# Altium PCB Hefesto.PcbDoc
Units mm, origin at the board's own origin, x right, y up, seen from the top; angles counter-clockwise.
Board outline 60 x 55 mm, 4 copper layers (Top Layer, GND Plane, Power Plane, Bottom Layer), stack 0.603 mm thick; 68 components, 52 nets, 247 pads, 55 vias.
Unrouted connection lines stored in the file: 40.
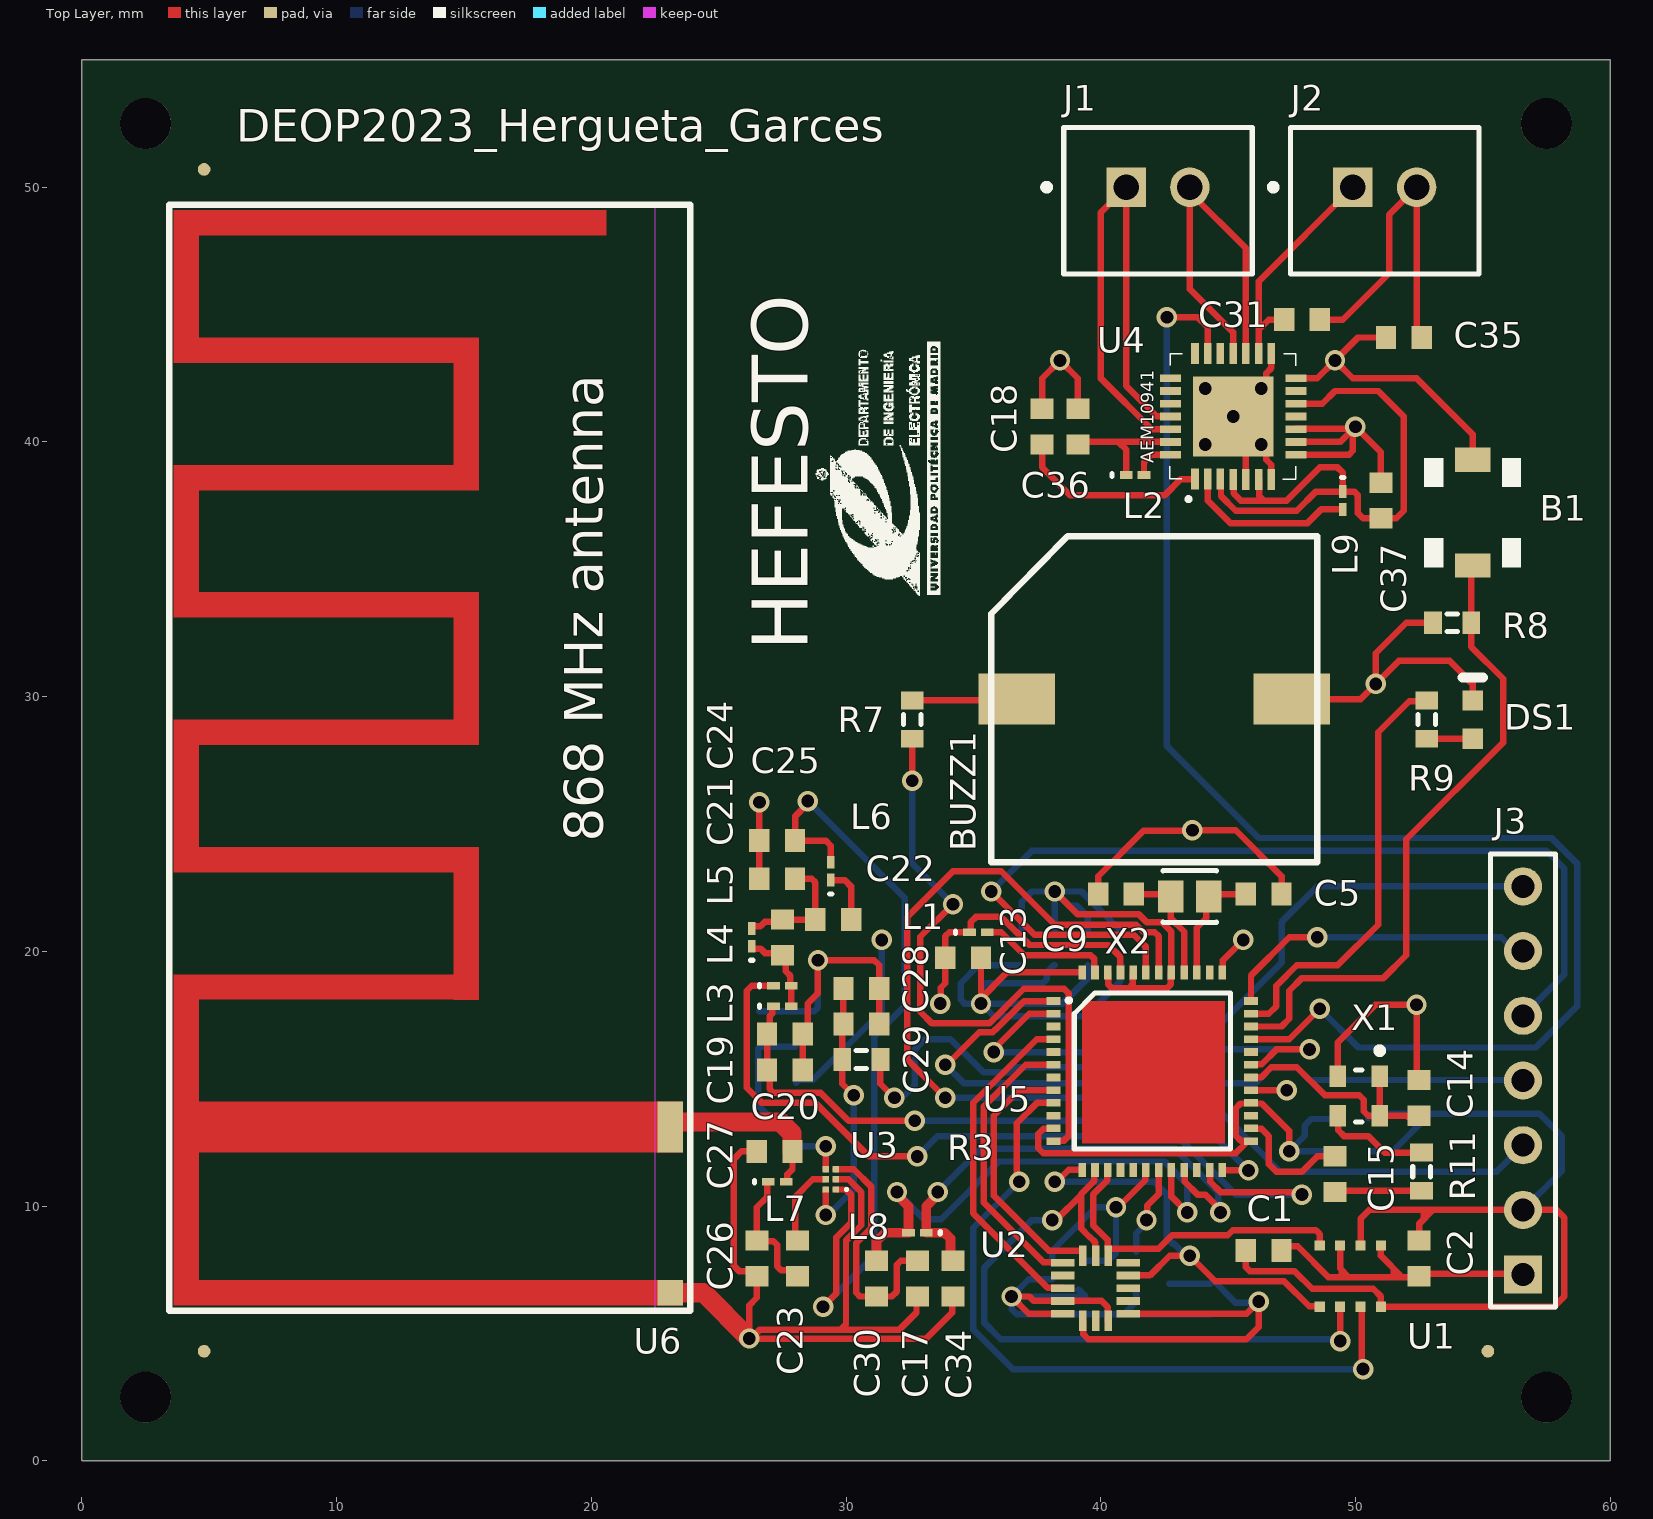
[diagram p0: Top Layer view]
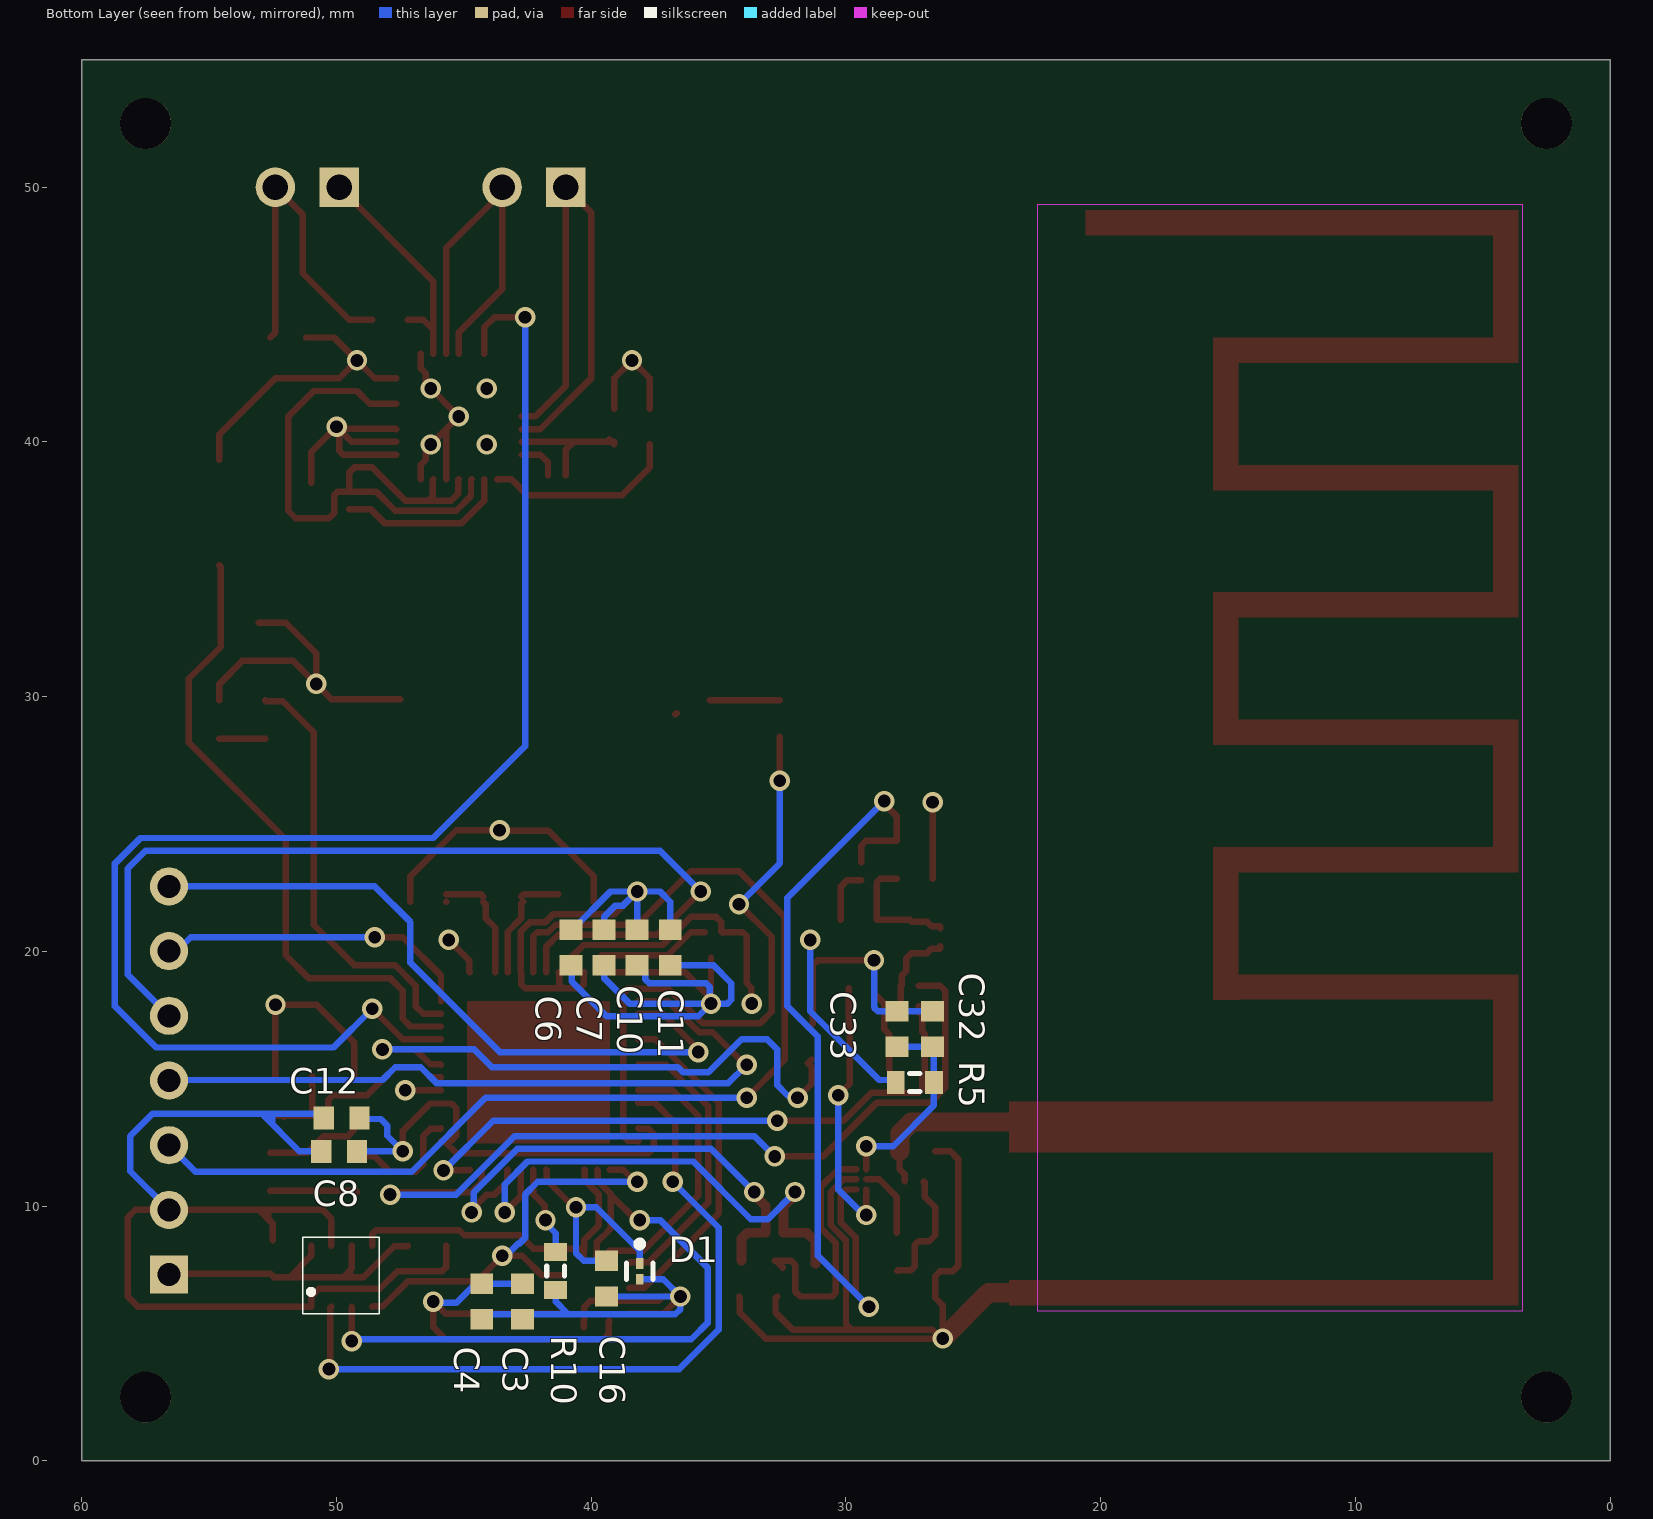
[diagram p1: Bottom Layer view, seen from below]
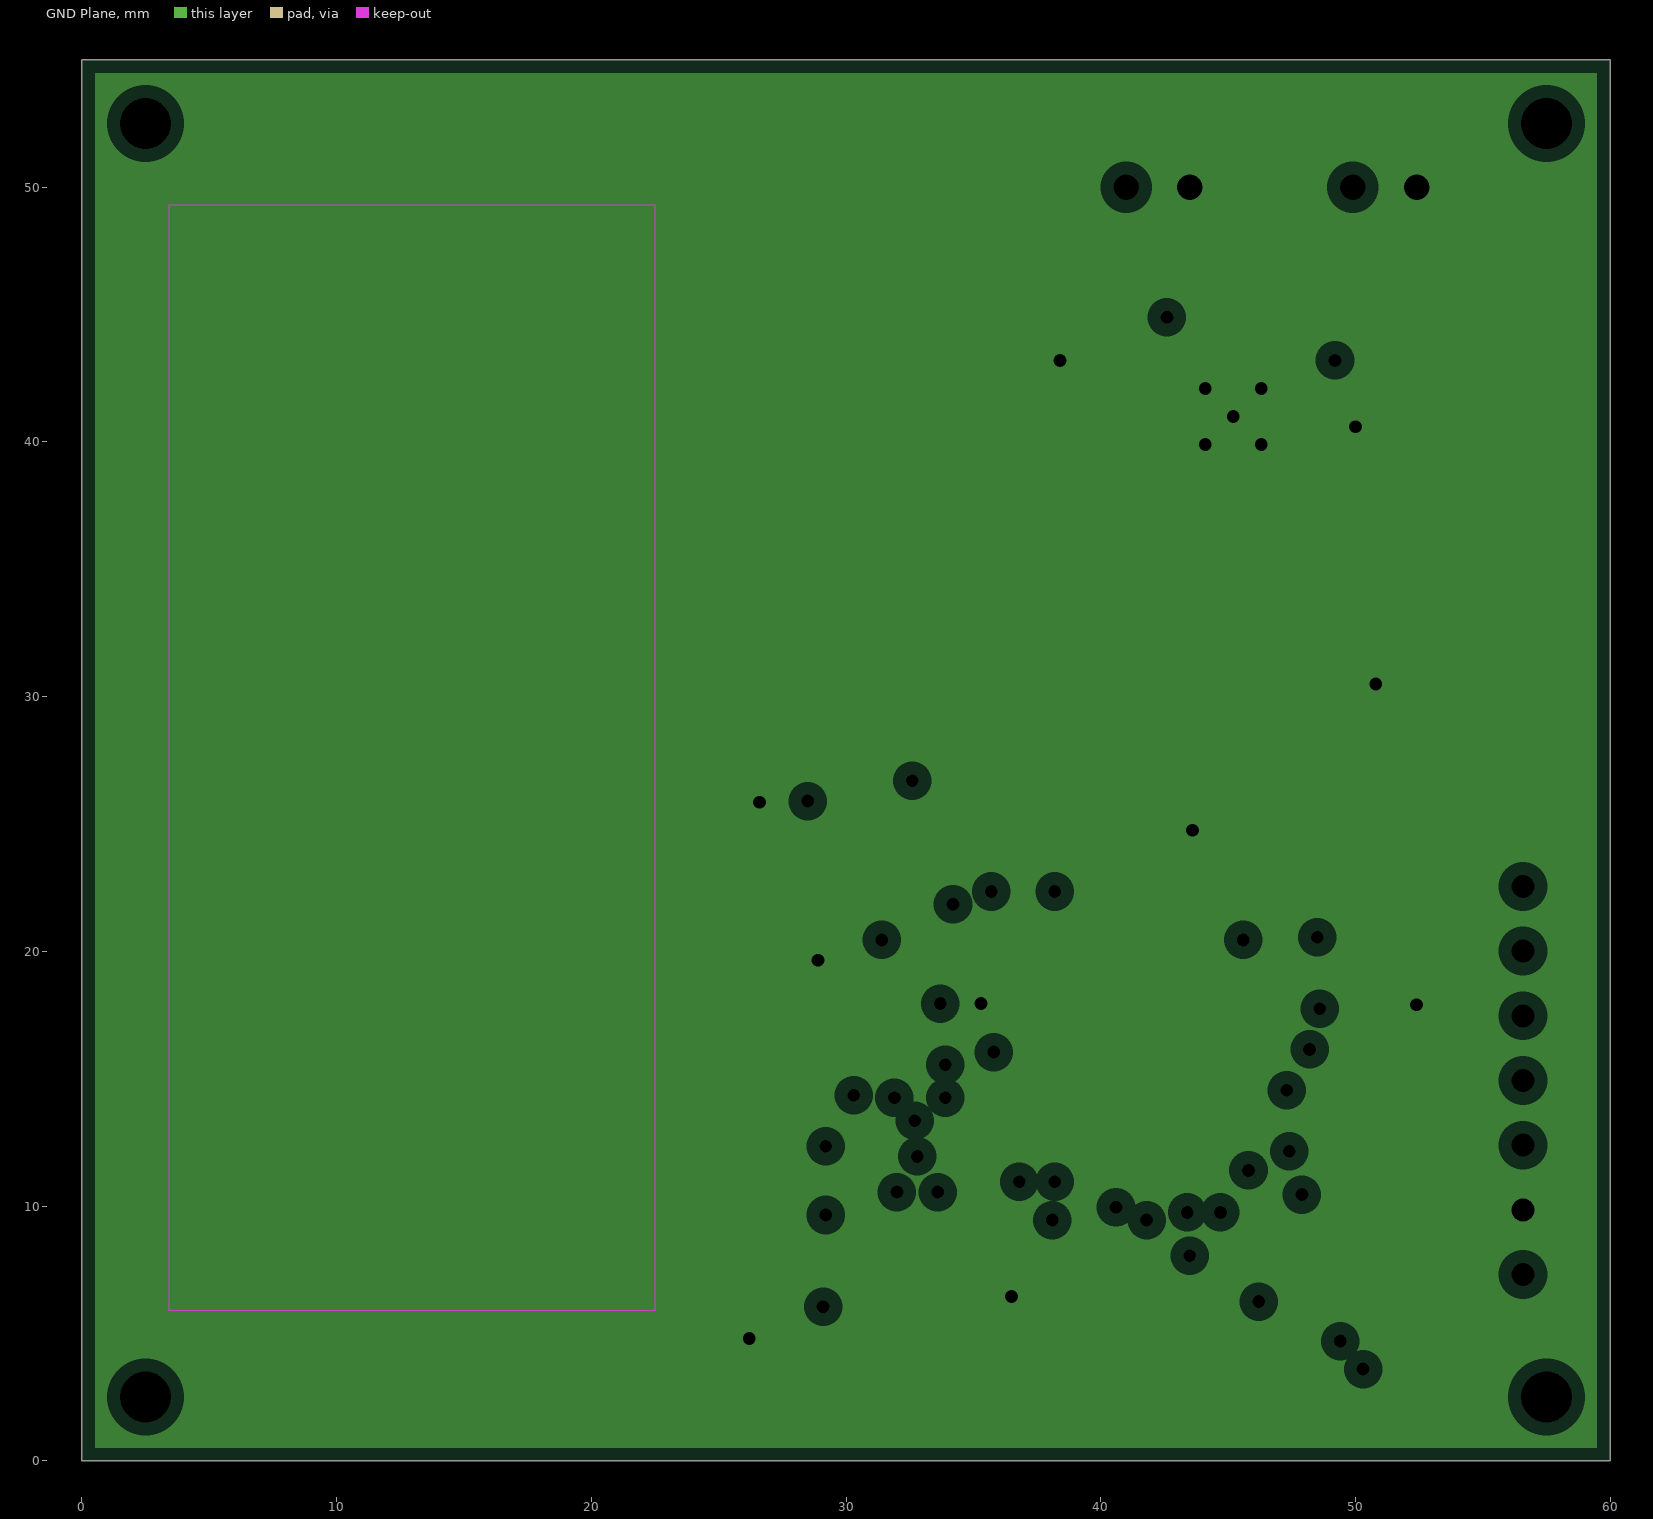
[diagram p2: GND Plane, clearances drawn from the general rule]
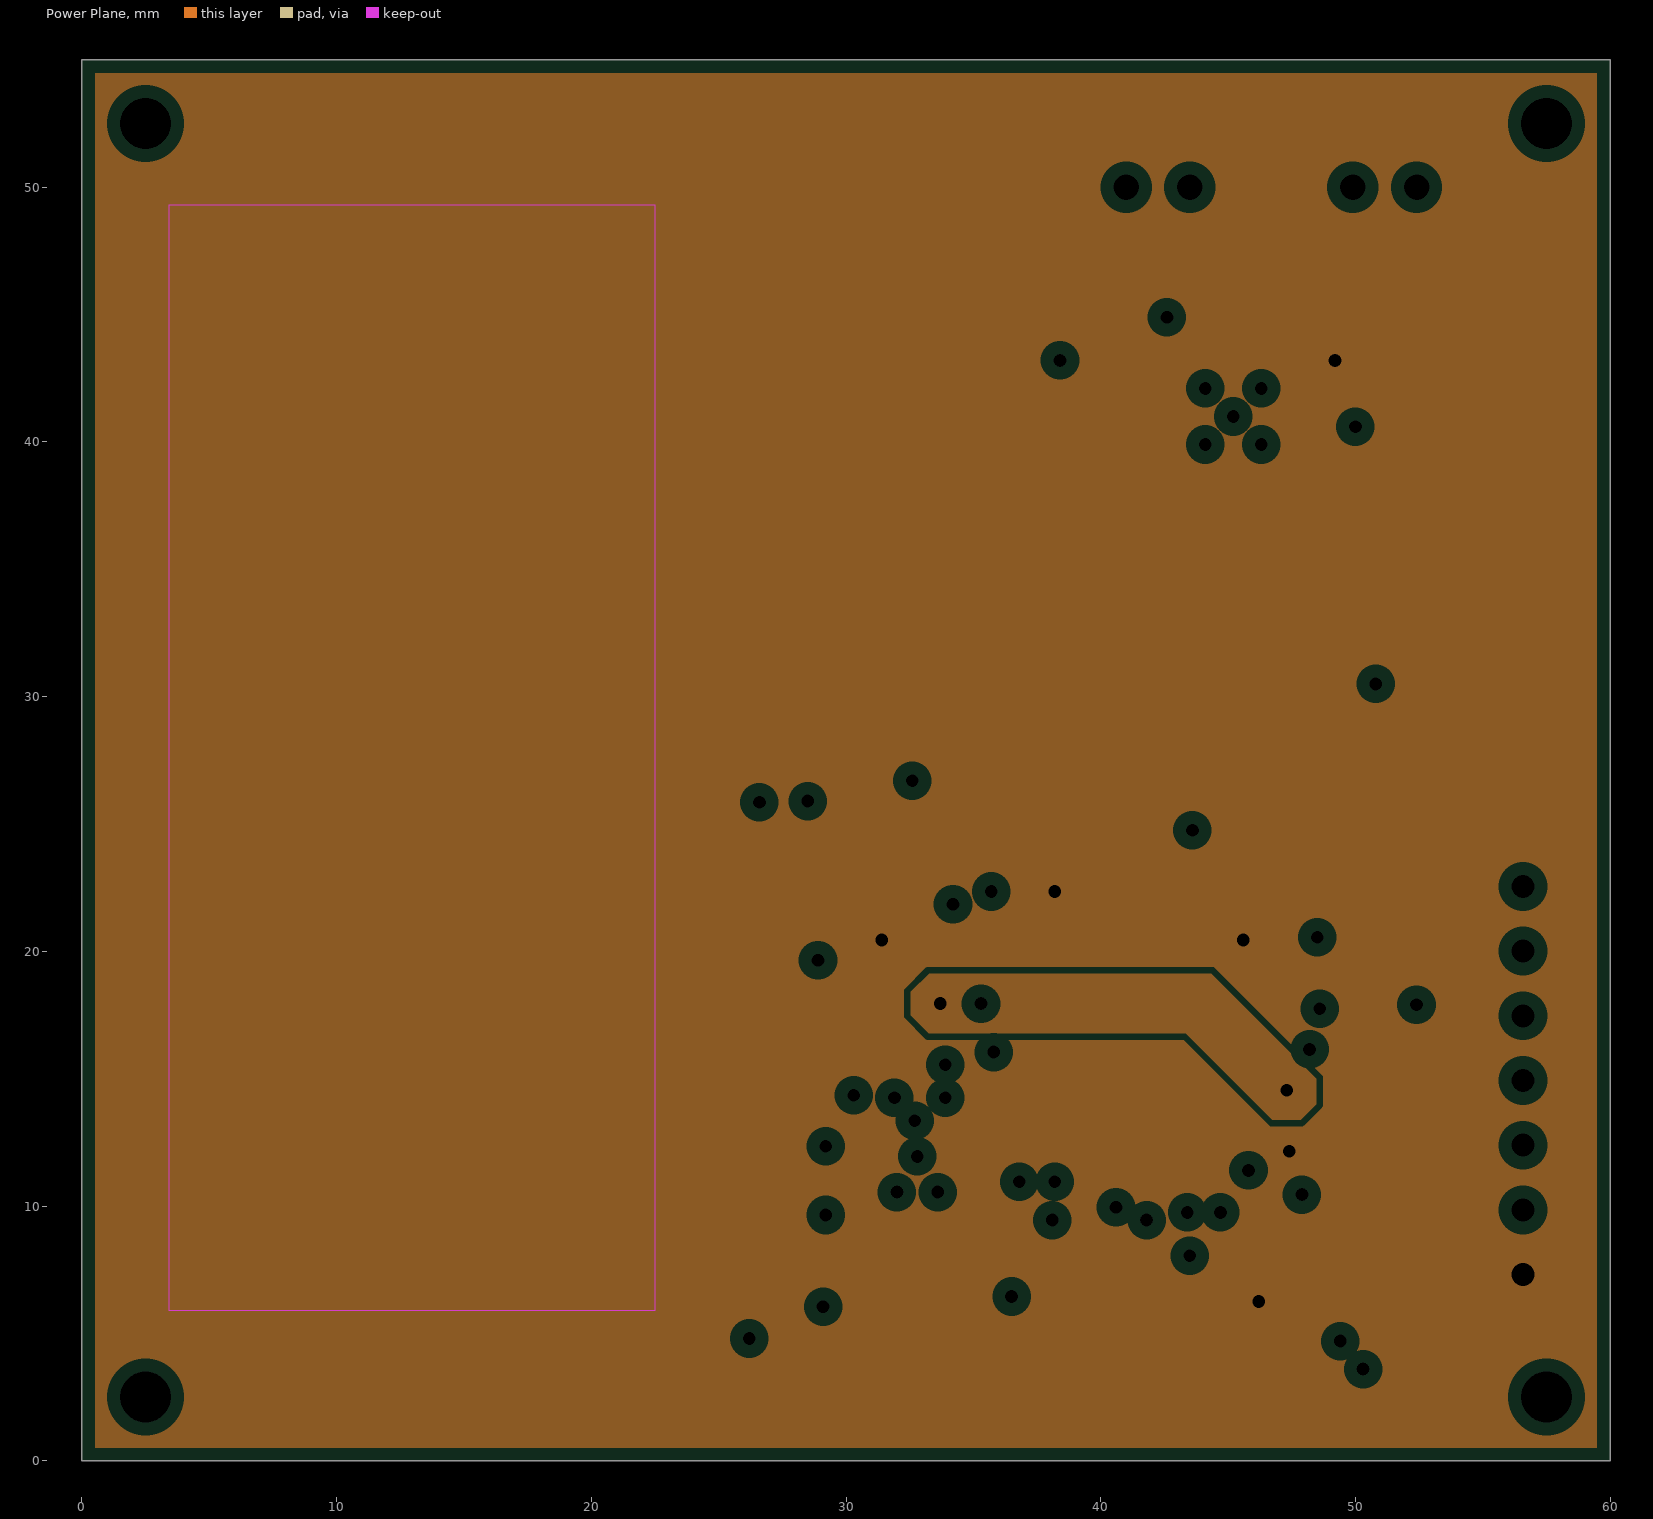
[diagram p3: Power Plane, clearances drawn from the general rule]

## Layer stack, top to bottom
Top Solder: solder mask 0.0102, Solder Resist, Dk 3.5
Top Layer: signal copper 0.0356
Dielectric 2: prepreg 0.0711, PP-006, Dk 4.1
GND Plane: plane copper 0.035, net GND
Dielectric 1: dielectric 0.32, FR-4, Dk 4.8
Power Plane: plane copper 0.035, net (Multiple Nets)
Dielectric 3: prepreg 0.0711, PP-006, Dk 4.1
Bottom Layer: signal copper 0.0356
Bottom Solder: solder mask 0.0102, Solder Resist, Dk 3.5

## Board outline
0,0 0,55 60,55 60,0

## Design rules (kind name [scope] priority, off if disabled: settings)
Clearance Clearance_Switch [InComponent('U3')] p1: gap=0.14 ignorepadtopadclearanceinfootprint=FALSE
Clearance Clearance_Antenna [InComponent('U6') vs InComponent('U6')] p2: gap=0 ignorepadtopadclearanceinfootprint=FALSE
Clearance [All] p3: gap=0.254 ignorepadtopadclearanceinfootprint=FALSE except(0: Arc-Hole Track-Hole SMDPad-Hole THPad-Hole Via-Hole Fill-Hole Poly-Hole Region-Hole Text-Hole; 0.09: Arc-Arc Arc-Track Track-Track; 0.127: SMDPad-SMDPad; 0.2: Arc-SMDPad Track-SMDPad; 0.33: Arc-THPad Track-THPad; 0.5: THPad-THPad)
DiffPairsRouting DiffPairsRouting_RFI [InDifferentialPair('RFI')] p1: maxlimit=0.254 minlimit=0.254 mostfreqgap=0.254 toplayer_minwidth=0.254 toplayer_maxwidth=0.381 toplayer_prefwidth=0.254 bottomlayer_minwidth=0.254 bottomlayer_maxwidth=0.381 bottomlayer_prefwidth=0.254 maxuncoupledlength=12.7
DiffPairsRouting [All] p2: maxlimit=0.254 minlimit=0.254 mostfreqgap=0.254 toplayer_minwidth=0.381 toplayer_maxwidth=0.381 toplayer_prefwidth=0.381 bottomlayer_minwidth=0.381 bottomlayer_maxwidth=0.381 bottomlayer_prefwidth=0.381 maxuncoupledlength=12.7
HoleSize [All] p1: absolutevalues=TRUE maxlimit=6.3 minlimit=0.2 maxpercent=80.000 minpercent=20.000
MinimumSolderMaskSliver MinimumSolderMaskSliver_SoC [HasFootprint('UFQFPN48') vs HasFootprint('UFQFPN48')] p1: minsoldermaskwidth=0
MinimumSolderMaskSliver MinimumSolderMaskSliver_PMIC [HasFootprint('AEM10941') vs HasFootprint('AEM10941')] p2: minsoldermaskwidth=0
MinimumSolderMaskSliver MinimumSolderMaskSliver_Switch [HasFootprint('INF-TSNP-6-2_V') vs HasFootprint('INF-TSNP-6-2_V')] p3: minsoldermaskwidth=0
MinimumSolderMaskSliver MinimumSolderMaskSliver_MEMS [HasFootprint('ADLX362FP') vs HasFootprint('ADLX362FP')] p4: minsoldermaskwidth=0
MinimumSolderMaskSliver MinimumSolderMaskSliver_Inductor [HasFootprint('0603') vs HasFootprint('0603')] p5: minsoldermaskwidth=0
MinimumSolderMaskSliver MinimumSolderMaskSliver_Diode [HasFootprint('FP-ST0201-MFG') vs HasFootprint('FP-ST0201-MFG')] p6: minsoldermaskwidth=0
MinimumSolderMaskSliver [All] p7: minsoldermaskwidth=0.254
PlaneClearance [All] p1: clearance=0.508
PlaneConnect [All] p1: planeconnectstyle=Relief reliefexpansion=0.508 reliefentries=4 reliefconductorwidth=0.254 reliefairgap=0.254
PolygonConnect [All] p1: connectstyle=Relief reliefconductorwidth=0.254 reliefentries=4 polygonreliefangle="90 Angle" airgapwidth=0.254
RoutingVias [All] p1: holewidth=0.711 width=1.27 viastyle="Through Hole" minholewidth=0.2 minwidth=0.25 maxholewidth=0.711 maxwidth=1.27
SilkToSolderMaskClearance SilkToSolderMaskClearance_PMIC [HasFootprint('AEM10941') vs HasFootprint('AEM10941')] p1: minsilkscreentomaskgap=0 clearancetoexposedcopper=TRUE
SilkToSolderMaskClearance SilkToSolderMaskClearance_Antenna [HasFootprint('Antenna_SWRA228') vs HasFootprint('Antenna_SWRA228')] p2: minsilkscreentomaskgap=0 clearancetoexposedcopper=TRUE
SilkToSolderMaskClearance SilkToSolderMaskClearance_Resistor [HasFootprint('J1-0603') vs HasFootprint('J1-0603')] p3: minsilkscreentomaskgap=0 clearancetoexposedcopper=TRUE
SilkToSolderMaskClearance SilkToSolderMaskClearance_Inductor [HasFootprint('0603') vs HasFootprint('0603')] p4: minsilkscreentomaskgap=0 clearancetoexposedcopper=TRUE
SilkToSolderMaskClearance SilkToSolderMaskClearance_Buzzer [HasFootprint('SOP_Buzzer') vs HasFootprint('SOP_Buzzer')] p5: minsilkscreentomaskgap=0 clearancetoexposedcopper=TRUE
SilkToSolderMaskClearance SilkToSolderMaskClearance_Switch [HasFootprint('INF-TSNP-6-2_V') vs HasFootprint('INF-TSNP-6-2_V')] p6: minsilkscreentomaskgap=0 clearancetoexposedcopper=TRUE
SilkToSolderMaskClearance SilkToSolderMaskClearance_SoC [HasFootprint('UFQFPN48') vs HasFootprint('UFQFPN48')] p7: minsilkscreentomaskgap=0 clearancetoexposedcopper=TRUE
SilkToSolderMaskClearance [IsPad] p8: minsilkscreentomaskgap=0.15 clearancetoexposedcopper=TRUE
SolderMaskExpansion [All] p1: expansion=0.05 istentingtop=FALSE
UnRoutedNet [All] p1: checkbadconnections=TRUE
Width [All] p1: maxlimit=0.762 minlimit=0.09 preferedwidth=0.254
23 further rules are at their usual default settings.

## Classes and differential pairs
component class SoC: C5 C6 C7 C8 C9 C10 C11 C12 C13 C14 C15 C16 D1 L1 R10 R11 U5 X1 X2
component class Sensors: C1 C2 C3 C4 U2
component class RF: C17 C19 C20 C21 C22 C23 C24 C25 C26 C27 C28 C29 C30 C32 C33 C34 L3 L4 L5 L6 L7 L8 R3 R5 U3 U6
component class Power: C18 C31 C35 C37 L2 L9 U4
component class "External Connectors": J1 J2 J3
component class Actuators: B1 BUZZ1 DS1 R7 R8 R9
differential pair RFI: +RFI_P -RFI_N

## Components (designator, comment, footprint, x,y, rotation, side; value= is the part's Value field where it differs from the comment)
B1 "Button" Button 52.7,35.075 r90 top
BUZZ1 "Buzzer" SOP_Buzzer 48.5,36.3 r270 top
C1 "Cap Semi" 1608[0603] 46.4,8.25 r0 top value=100nF
C2 "Cap Semi" 1608[0603] 52.5,7.95 r270 top value=100nF
C3 "Cap Semi" 1608[0603] 42.7,6.25 r90 bottom value=100nF
C4 "Cap Semi" 1608[0603] 44.3,6.25 r90 bottom value=100nF
C5 "Cap Semi" 1608[0603] 46.4,22.25 r180 top value=5.1pF
C6 "Cap Semi" 1608[0603] 40.8,20.15 r90 bottom value=4.7uF
C7 "Cap Semi" 1608[0603] 39.5,20.15 r90 bottom value=100nF
C8 "Cap Semi" 1608[0603] 49.9,12.15 r180 bottom value=100nF
C9 "Cap Semi" 1608[0603] 40.6,22.25 r0 top value=5.1pF
C10 "Cap Semi" 1608[0603] 38.2,20.15 r90 bottom value=1uF
C11 "Cap Semi" 1608[0603] 36.9,20.15 r90 bottom value=10nF
C12 "Cap Semi" 1608[0603] 49.8,13.45 r180 bottom value=4.7uF
C13 "Cap Semi" 1608[0603] 34.6,19.75 r180 top value=470nF
C14 "Cap Semi" 1608[0603] 52.5,14.25 r270 top value=10nF
C15 "Cap Semi" 1608[0603] 49.2,11.25 r90 top value=15pF
C16 "Cap Semi" 1608[0603] 39.4,7.15 r90 bottom value=100nF
C17 "Cap Semi" 1608[0603] 32.8,7.15 r90 top value="0.7 - 1.2pF"
C18 "Cap Semi" 1608[0603] 37.7,40.6 r270 top value=22uF
C19 "Cap Semi" 1608[0603] 27.6,16.75 r180 top value=47nF
C20 "Cap Semi" 1608[0603] 27.6,15.35 r180 top value=68pF
C21 "Cap Semi" 1608[0603] 27.5,20.55 r270 top value=2.7pF
C22 "Cap Semi" 1608[0603] 29.5,21.25 r180 top value=68pF
C23 "Cap Semi" 1608[0603] 28.1,7.95 r90 top value=68pF
C24 "Cap Semi" 1608[0603] 27.3,22.85 r0 top value=15pF
C25 "Cap Semi" 1608[0603] 27.3,24.35 r0 top value=3.6pF
C26 "Cap Semi" 1608[0603] 26.5,7.95 r270 top value=6.8pF
C27 "Cap Semi" 1608[0603] 27.2,12.15 r180 top value=6.8pF
C28 "Cap Semi" 1608[0603] 30.6,18.55 r0 top value=1nF
C29 "Cap Semi" 1608[0603] 30.6,17.15 r0 top value=100nF
C30 "Cap Semi" 1608[0603] 31.2,7.15 r90 top value=3.6pF
C31 "" 1608[0603] 47.9,44.8 r180 top value=150uF
C32 "Cap Semi" 1608[0603] 26.6,16.95 r90 bottom value=1nF
C33 "Cap Semi" 1608[0603] 28,16.95 r90 bottom value=100nF
C34 "Cap Semi" 1608[0603] 34.2,7.15 r90 top value=4.7pF
C35 "" 1608[0603] 51.9,44.1 r180 top value=10uF
C36 "Cap Semi" 1608[0603] 39.1,40.6 r270 top value=47uF
C37 "" 1608[0603] 51,37.7 r270 top value=10uF
D1 "ESDALC6V1-1U2" FP-ST0201-MFG 38.1,7.437 r270 bottom value=12pF
DS1 "HSMH-C190" AVAG-HSMX-C190_V 54.6,29.1 r90 top
J1 "B2B-XH-A(LF)(SN)" FP-B2B-XH-A_LF_SN-MFG 42.25,49.475 r0 top
J2 "B2B-XH-A(LF)(SN)" FP-B2B-XH-A_LF_SN-MFG 51.15,49.475 r0 top
J3 "Header 7" HDR1X7 56.58,7.31 r90 top
L1 "Inductor" 0603 35.2,20.75 r0 top value=15uH
L2 "" 0603 41.35,38.7 r0 top
L3 "Inductor" 0603 27.5,17.85 r0 top value=56nH
L4 "Inductor" 0603 27.5,18.65 r0 top value=0
L5 "Inductor" 0603 26.3,20.55 r90 top value=11nH
L6 "Inductor" 0603 29.4,23.15 r90 top value=20nH
L7 "Inductor" 0603 27.3,10.95 r0 top value=16nH
L8 "Inductor" 0603 32.8,8.95 r180 top value=33nH
L9 "" 0603 49.5,37.7 r270 top
R3 "Res3" J1-0603 30.6,15.75 r0 top value=100
R5 "Res3" J1-0603 27.3,14.85 r0 bottom value=100
R7 "Res3" J1-0603 32.6,29.1 r270 top value=330
R8 "Res3" J1-0603 53.8,32.9 r0 top value=10K
R9 "Res3" J1-0603 52.8,29.1 r90 top value=100
R10 "Res3" J1-0603 41.4,7.45 r90 bottom value=10K
R11 "Res3" J1-0603 52.6,11.35 r270 top value=330
U1 "BME680" BME680 51,8.45 r270 top
U2 "ADXL362" ADLX362FP 39.8,6.775 r180 top
U3 "BGS12SN6" INF-TSNP-6-2_V 29.4,11.05 r180 top
U4 "AEM10941" AEM10941 45.2,41 r90 top
U5 "STM32WLE5" UFQFPN48 38.15,18.05 r0 top
U6 "Antenna" Antenna_SWRA228 13.6,27.6 r90 top
X1 "ASDMB-32.000MHZ-XY-T" FP-ASDM-ASDMB-MFG 50.125,14.325 r180 top
X2 "NX2012SA-32.768KHZ" FP-NX2012SA-MFG 43.5,22.15 r180 top

## Footprints (in the part's own frame and the unit in brackets; to place one, negate y for a bottom-side part, rotate by r counter-clockwise, add the part's x,y. Pads: shape width x height; smd on the part's side, far side on the other; paste and mask are expansions set on the pad)
0603 [mm] "Chip Inductor, Body 0.6x0.3mm, IPC High Density"
  rect 0.5x0.3 smd: 1(-0.35,0) 2(0.35,0)
  silkscreen extent -0.9,-0.05 -0.9,0.05, body extent -0.33,-0.18 0.33,0.18, height 0.55
1608[0603] [mm] "Chip Capacitor, Body 1.6x0.8mm, IPC High Density"
  rect 0.8x0.9 smd: 1(-0.7,0) 2(0.7,0)
  body extent -0.87,-0.48 0.87,0.48, height 1.3
ADLX362FP [mm]
  rect 0.925x0.3 smd: 1(-1.288,1) 2(-1.288,0.5) 3(-1.288,0) 4(-1.288,-0.5) 5(-1.288,-1) 9(1.288,-1) 10(1.288,-0.5) 11(1.288,0) 12(1.288,0.5) 13(1.288,1)
  rect 0.3x0.8 smd: 6(-0.5,-1.275) 7(0,-1.275) 8(0.5,-1.275) 14(0.5,1.275) 15(0,1.275) 16(-0.5,1.275)
  body extent -1.85,-1.78 1.85,1.78, height 1
AEM10941 [mm]
  rect 0.825x0.3 smd: 1(-2.464,1.5) 2(-2.464,1) 3(-2.464,0.5) 4(-2.465,0) 5(-2.467,-0.5) 6(-2.467,-1) 7(-2.467,-1.5) 15(2.463,-1.5) 16(2.463,-1) 17(2.463,-0.5) 18(2.463,0) 19(2.463,0.5) 20(2.463,1) 21(2.463,1.5)
  rect 0.3x0.825 smd: 8(-1.5,-2.463) 9(-1,-2.463) 10(-0.5,-2.463) 11(0,-2.463) 12(0.5,-2.463) 13(1,-2.463) 14(1.5,-2.463) 22(1.5,2.463) 23(1,2.463) 24(0.5,2.463) 25(0,2.463) 26(-0.5,2.463) 27(-1,2.463) 28(-1.5,2.463)
  rect 3.15x3.15 smd: 29(0,0)
  silkscreen extent -3.28,-2.46 2.46,2.49, body extent -2.46,-2.46 2.49,2.49, height 0.85
Antenna_SWRA228 [mm]
  rect 1x1 smd: 0(-21,-9.5)
  rect 2x1 smd: 1(-14.5,-9.5)
  Top Layer region: -15.5,-10 -13.5,-10 -13.5,10 -15.5,10
  Top Layer region: 20.5,-7 21.5,-7 21.5,9 20.5,9
  Top Layer region: 15.5,9 21.5,9 21.5,10 15.5,10
  Top Layer region: 15.5,-1 16.5,-1 16.5,9 15.5,9
  Top Layer region: 10.5,-2 16.5,-2 16.5,-1 10.5,-1
  Top Layer region: 10.5,-1 11.5,-1 11.5,9 10.5,9
  Top Layer region: 5.5,-1 6.5,-1 6.5,9 5.5,9
  Top Layer region: 5.5,9 11.5,9 11.5,10 5.5,10
  Top Layer region: 0.5,-2 6.5,-2 6.5,-1 0.5,-1
  Top Layer region: 0.5,-1 1.5,-1 1.5,9 0.5,9
  Top Layer region: -4.5,9 1.5,9 1.5,10 -4.5,10
  Top Layer region: -4.5,-1 -3.5,-1 -3.5,9 -4.5,9
  Top Layer region: -9.5,-2 -3.5,-2 -3.5,-1 -9.5,-1
  Top Layer region: -9.5,-1 -8.5,-1 -8.5,9 -9.5,9
  Top Layer region: -13.5,9 -8.5,9 -8.5,10 -13.5,10
  Top Layer region: -20.5,9 -15.5,9 -15.5,10 -20.5,10
  Top Layer region: -21.5,-10.001 -20.5,-10.001 -20.5,9.999 -21.5,9.999
  Keep-Out Layer region: -21.717,10.16 21.717,10.16 21.717,-8.89 -21.717,-8.89
  silkscreen extent -21.72,-10.29 21.72,10.16
AVAG-HSMX-C190_V [mm] "SMD, 2-Leads, Body 1.6x0.8mm, Height 0.9mm"
  rect 0.8x0.8 smd: 1(-0.75,0) 2(0.75,0)
  silkscreen extent 1.65,-0.4 1.65,0.4, body extent -0.8,-0.4 0.8,0.4, height 0.9
BME680 [mm]
  rect 0.4x0.4 smd: 1(2.4,0) 2(2.4,-0.8) 3(2.4,-1.6) 4(2.4,-2.4) 5(0,-2.4) 6(0,-1.6) 7(0,-0.8) 8(0,0)
  body extent -0.33,-2.68 2.68,0.33, height 0.25
Button [mm]
  rect 0.95x1.4 smd: 1(0.075,-1.9) 2(4.225,-1.9)
  silkscreen extent 0,-3.8 4.3,0
FP-ASDM-ASDMB-MFG [mm]
  rect 0.65x0.85 smd paste+0 mask+0: 1(-0.825,-0.775) 2(0.825,-0.775) 3(0.825,0.775) 4(-0.825,0.775)
  silkscreen extent -0.95,-1.9 0.13,1.02, body extent -1.38,-1.3 1.38,1.3, height 0.25
FP-B2B-XH-A_LF_SN-MFG [mm]
  rect 1.55x1.55 hole 1 paste-1000 mask+0: 1(-1.25,0.525)
  round 1.55 hole 1 paste-1000 mask+0: 2(1.25,0.525)
  silkscreen extent -4.5,-2.88 3.7,2.88, body extent -3.8,-2.98 3.8,2.98, height 0.25
FP-NX2012SA-MFG [mm]
  rect 1x1.25 smd paste+0 mask+0: 1(-0.75,0) 2(0.75,0)
  silkscreen extent -1.05,-1.02 1.05,1.02, body extent -1.35,-0.72 1.35,0.72, height 0.25
FP-ST0201-MFG [mm]
  rect 0.425x0.3 smd paste-1000 mask+0: 1(-0.312,0) 2(0.312,0)
  silkscreen extent -1.2,-0.53 0.33,0.53, body extent -0.3,-0.15 0.3,0.15, height 0.33
HDR1X7 [mm] "Connector; Header; 7 Position"
  rect 1.5x1.5 hole 0.9: 1(0,0)
  round 1.5 hole 0.9: 2(2.54,0) 3(5.08,0) 4(7.62,0) 5(10.16,0) 6(12.7,0) 7(15.24,0)
  silkscreen extent -1.27,-1.27 16.51,1.27
INF-TSNP-6-2_V [mm] "TSNP, 6-Leads, Body 1.1x0.7mm, Pitch 0.4mm"
  rect 0.25x0.25 smd: 1(-0.2,0.4) 2(-0.2,0) 3(-0.2,-0.4) 4(0.2,-0.4) 5(0.2,0) 6(0.2,0.4)
  silkscreen extent -0.67,0.35 -0.58,0.45, body extent -0.35,-0.55 0.35,0.55, height 0.4
J1-0603 [mm] "Chip Resistor, Body 1.6x0.8mm, IPC High Density"
  rect 0.7x0.9 smd: 1(-0.75,0) 2(0.75,0)
  silkscreen extent -0.2,-0.35 0.2,0.35, body extent -0.85,-0.48 0.85,0.48, height 0.9
SOP_Buzzer [mm]
  rect 2x3 smd: 1(6.4,-1) 2(6.4,-11.8)
  silkscreen extent 0,-12.8 12.8,0
UFQFPN48 [mm]
  rect 0.55x0.3 smd: 1(0,0) 2(0,-0.5) 3(0,-1) 4(0,-1.5) 5(0,-2) 6(0,-2.5) 7(0,-3) 8(0,-3.5) 9(0,-4) 10(0,-4.5) 11(0,-5) 12(0,-5.5) 25(7.75,-5.5) 26(7.75,-5) 27(7.75,-4.5) 28(7.75,-4) 29(7.75,-3.5) 30(7.75,-3) 31(7.75,-2.5) 32(7.75,-2) 33(7.75,-1.5) 34(7.75,-1) 35(7.75,-0.5) 36(7.75,0)
  rect 0.3x0.55 smd: 13(1.125,-6.625) 14(1.625,-6.625) 15(2.125,-6.625) 16(2.625,-6.625) 17(3.125,-6.625) 18(3.625,-6.625) 19(4.125,-6.625) 20(4.625,-6.625) 21(5.125,-6.625) 22(5.625,-6.625) 23(6.125,-6.625) 24(6.625,-6.625) 37(6.625,1.125) 38(6.125,1.125) 39(5.625,1.125) 40(5.125,1.125) 41(4.625,1.125) 42(4.125,1.125) 43(3.625,1.125) 44(3.125,1.125) 45(2.625,1.125) 46(2.125,1.125) 47(1.625,1.125) 48(1.125,1.125)
  Top Layer region: 1.125,-5.6 6.725,-5.6 6.725,0 1.125,0
  silkscreen extent 0.56,-5.81 6.94,0.32, body extent 0.77,-5.95 7.1,0.38, height 0.03

## Part data
C1 C2 C3 C4 C5 C6 C7 C8 C9 C10 C11 C12 C13 C14 C15 C16 C17 C18 C19 C20 C21 C22 C23 C24 C25 C26 C27 C28 C29 C30 C32 C33 C34 C36: "Capacitor (Semiconductor SIM Model)", LatestRevisionDate=29-May-2009, LatestRevisionNote="IPC-7351 Footprint Added.", PackageDescription="Chip Capacitor", PackageReference=C1206, Published=8-Jun-2000, Publisher="Altium Limited"
C31 C35 C37: library part "Cap Semi", "Capacitor (Semiconductor SIM Model)", LatestRevisionDate=29-May-2009, LatestRevisionNote="IPC-7351 Footprint Added.", PackageDescription="Chip Capacitor", PackageReference=C1206, Published=8-Jun-2000, Publisher="Altium Limited"
D1: library part CMP-12225-000007-1, "TVS DIODE 3V ST0201", Breakdown Voltage=6.1V, Capacitance=12pF, Manufacturer=STMicroelectronics, Max Junction Temp=+125°C, Package=ST0201, Peak Pulse Current=2A, Peak Pulse Power=20W, Temperature="-40°C to +125°C", Temperature Range Low=-40°C, Automotive=No, Category=Diode, ComponentLink2Description=Datasheet, ComponentLink2URL=https://www.st.com/content/ccc/resource/technical/document/datasheet/90/b1/aa/a3/9f/73/4d/1e/CD00212838.pdf/files/CD00212838.pdf/jcr:content/translations/en.CD00212838.pdf, Device Class L1="Circuit Protection", Device Class L2="TVS Diodes", Device Class L3=unset, Digikey Description="TVS DIODE 3V ST0201", Direction=Unidirectional, Height=0.33mm, Lead Free=Yes, Manufacturer Part Number=ESDALC6V1-1U2, Mouser Description="TVS Diodes - Transient Voltage Suppressors Single-Line Low Cap ESD TVS 0201", Number Of Channels=1, Octopart=https://octopart.com/esdalc6v1-1u2-stmicroelectronics-11912330, RoHS=TRUE, Temperature Range High=+125°C
DS1: library part CMP-1744-00004-1, "LED Uni-Color Red, 65 mW, 20 mA, -40 to 85 degC, 2-Pin SMD, RoHS, Tape and Reel", Current Rating="1 A", Max Operating Temperature="85 degC", Min Operating Temperature="-30 degC", Package Quantity=2000, ComponentLink1Description="Manufacturer URL", ComponentLink1URL=http://www.avagotech.com/, ComponentLink2Description=Datasheet, ComponentLink2URL=http://docs.avagotech.com/docs/AV02-0551EN, ComponentLink3Description="Package Specification", ComponentLink3URL=http://www.fairchildsemi.com/dwg/MA/MA03D.pdf, Connector Type=USB, Contact Material=Copper, Contact Plating=Gold, DatasheetVersion=Mar-12, Gender=Male, Height="2.8 mm", Lead Pitch="0.65 mm", Length="7.5 mm", Mount="Surface Mount", PackageDescription="2-Pin Surface Mount Device, Body 1.6 x 0.8 mm, Height 0.9 mm", PackageReference=HSMX-C190, Packaging="Tape and Reel", Pins=5, REACH SVHC="No SVHC", RoHSCompliant=true, Width="5.6 mm"
J1 J2: library part CMP-2000-05888-3, "CONN HEADER VERT 2POS 2.5MM", Color=Natural, Contact Resistance=20mR, Current Rating=3A, Housing Color=White, Insulation Resistance=1GR, Max Operating Temperature=85°C, Max Voltage Rating (AC)=250V, Min Operating Temperature=-25°C, Connector Type="Male Pin", Contact Material=Brass, Contact Plating=Tin, Contact Type="Male Pin", Depth=5.75mm, Fastening Type=Detent, Housing Material=Polyamide, Lead Free="Lead Free", Lead Pitch=2.5mm, Length=7.4mm, Max Current Rating=3A, Max Voltage Rating (DC)=250V, Mount="Through Hole", Number of Contacts=2, Number of Positions=2, Number of Rows=1, Orientation=Straight, Packaging=Bulk, Pitch=2.5mm, REACH SVHC="No SVHC", Series=XH, Termination=Solder, Voltage Rating=250V, Voltage Rating (AC)=250V, Wire/Cable Gauge=22AWG
J3: "Header, 7-Pin", LatestRevisionDate=17-Jul-2002, LatestRevisionNote="Re-released for DXP Platform.", Publisher="Altium Limited"
L2 L9: library part Inductor, "Inductor", Code_IEC=1005, Code_JEITA=0402, LatestRevisionDate=29-May-2009, LatestRevisionNote="IPC-7351 Footprint Added.", LBOOST=10uH, PackageDescription="Chip Inductor", PackageReference=0402-A, Published=8-Jun-2000, Publisher="Altium Limited"
R3 R5 R7 R8 R9 R10 R11: "Resistor", LatestRevisionDate=29-May-2009, LatestRevisionNote="IPC-7351 Footprint Added.", PackageDescription="Chip Resistor", PackageReference=J1-0603, Published=8-Jun-2000, Publisher="Altium Limited"
U3: library part CMP-1088-00016-1, "Wideband RF SPDT Switch, 0.1 to 6 GHz, TSNP-6, Reel, Green", Frequency ( f ) Range="0.1 to 6 GHz", Manufacturer=Infineon, Supply Voltage Range="1.8 - 3.5", ComponentLink1Description="Manufacturer URL", ComponentLink1URL=http://www.infineon.com/, ComponentLink2Description=Datasheet, ComponentLink2URL=http://www.infineon.com/dgdl/BGS12SN6_2014-05-23.pdf?folderId=db3a30431f848401011fcbf2ab4c04c4&fileId=db3a30433f1b26e8013f2db58bc03856, ComponentLink3Description="Package Specification", ComponentLink3URL=http://www.infineon.com/dgdl/TSNP-6-2-Package_Overview.pdf?folderId=db3a304327b89750012805e1379a6124&fileId=db3a30433c6612b1013c6bcb02293ba1, DatasheetVersion="Rev. 1.2", Green=TRUE, Halogen-free=TRUE, Insertion Loss @1GHz="0.25 dB", Isolation @1GHz="40 dB", Mounting Technology="Surface Mount", PackageDescription="6-Pin Thin Small Non Leaded Package, 1.1 x 0.7 mm Body, 0.4 mm Pitch", PackageReference=TSNP-6-2, PackageVersion=Jan-13, Packing="Tape and Reel", PartNumber=BGS12SN6, Pmax="30 dBm", Switch Type=SPDT
U4: "AEM10941 - Symbol QFN28"
X1: library part CMP-27762-009266-1, "MEMS Oscillator 32MHz ±10ppm LVCMOS 1.8V~3.3V SMD 2.5x2mm", Case/Package=SMD/SMT, Frequency=32MHz, Frequency Stability=10ppm, Load Capacitance=15pF, Max Operating Temperature=105°C, Max Supply Current=16mA, Min Operating Temperature=-40°C, Operating Supply Voltage=3.6V, Height=0.035inch, Length=0.098inch, Mount="Surface Mount", Number of Pins=4, Packaging="Tape and Reel", Radiation Hardening=No, RoHS Compliant=Yes, Series="Pure Silicon™ ASDMB", Termination=SMD/SMT, Width=0.079inch
X2: library part CMP-200220-000014-1, "CRYSTAL 32.7680KHZ 6PF SMD"
L1 L3 L4 L5 L6 L7 L8: Code_IEC=1005, Code_JEITA=0402, LatestRevisionDate=29-May-2009, LatestRevisionNote="IPC-7351 Footprint Added.", PackageDescription="Chip Inductor", PackageReference=0402-A, Published=8-Jun-2000, Publisher="Altium Limited"

## Free pads (board coordinates)
  round 0.5 smd mask+0.5: 3(4.8,4.3) 3(4.8,50.7) 3(55.2,4.3)
  round 2 hole 2 unplated mask+0: ""(2.5,2.5) ""(2.5,52.5) ""(57.5,2.5) ""(57.5,52.5)

## Via types
v1: diameter 0.8, hole 0.5, Top Layer to Bottom Layer, 55 vias

## Nets (pads, with @x,y where several pads share a name; then routed paths per layer and width w, separated by ;. In a path a pad name is that pad's centre, name@x,y a point inside that pad or via, vN(x,y) a via of type N, cw(c..) or ccw(c..) an arc to the next point about the centre after c; other vN are vias at no path point)
2V5: B1.2 C1.2 C2.2 C3.2 C4.2 C6.2 C7.2 C8.2 C10.2 C11.2 C12.2 C35.2 J3.1 R5.2 U1.6 U1.8 U2.1 U2.14 U4.14 U5.11 U5.25 U5.28 U5.37 U5.41 U5.44 U5.46 | length 91.3
  Top Layer w0.254: U5.11 38.127,13.027 37.74,13.027 37.548,12.835 37.548,12.265 37.744,12.069 45.294,12.069 45.775,12.55 U5.25 45.877,12.573 45.49,12.573 45.298,12.765 45.298,13.835 45.49,14.027 46.323,14.027 47.4,12.95 v1(47.4,12.15) ; v1(38.2,22.35) 39.1,21.45 41.5,21.45 41.8,21.15 42.4,21.15 42.775,20.775 U5.41 42.752,19.152 42.752,18.702 42.6,18.55 41.1,18.55 ; U2.14 39.323,5.477 39.323,4.965 39.515,4.773 45.723,4.773 46.2,5.25 v1(46.2,6.25) 45.725,5.775 U2.1 U2.1@41.11,5.798 ; U5.46 40.298,19.152 40.298,18.699 40.447,18.55 41.1,18.55 ; U5.44 41.252,19.152 41.252,18.702 41.1,18.55 ; U5.37 44.798,19.198 44.798,19.648 v1(45.6,20.45) ; C1.2@47.2,8.45 47.232,8.418 47.732,8.418 48.94,7.21 49.74,7.21 ; U4.14 48.5,42.5 v1(49.2,43.2) ; U1.6@49.4,8.35 49.4,7.55 49.74,7.21 ; U1.6@49.4,8.377 U1.6 ; U1.8 51,8.05 51.84,7.21 ; C35.2 50.1,44.1 v1(49.2,43.2) ; B1.2 54.6,40.3 52.4,42.5 49.9,42.5 v1(49.2,43.2) ; J3.1 56.54,7.35 52.6,7.35 C2.2 52.46,7.21 51.84,7.21 ; 49.74,7.21 51.84,7.21
  Bottom Layer w0.254: R5.2 28.15,14.95 28.7,14.95 31.4,17.65 v1@31.4,20.494 ; C11.2 36.9,21.95 37.3,22.35 v1(38.2,22.35) ; C10.2 v1(38.2,22.35) ; C7.2 39.5,21.35 39.052,21.798 38.752,21.798 v1(38.2,22.35) ; C6.2 40.75,20.85 39.25,22.35 v1(38.2,22.35) ; C3.2 C4.2 ; C4.2@44.475,7.025 45.292,6.208 46.158,6.208 v1(46.2,6.25) ; C12.2 49.068,13.418 48.268,13.418 48.012,13.162 48.012,12.762 v1(47.4,12.15) C8.2
  other v1: 31.4,20.45
BOOT0: R10.2 U5.19 | length 3.6
  Top Layer w0.254: v1(41.8,9.45) 41.824,9.474 41.824,10.022 42.275,10.473 U5.19
  Bottom Layer w0.254: R10.2 41.4,8.931 41.8,9.331 v1(41.8,9.45)
BUCK: C37.2 L9.1 U4.3 U4.4 U4.6 U4.12 | length 25.2
  Top Layer w0.254: U4.3 44.723,38.513 44.723,37.877 45.3,37.3 47.7,37.3 48.45,38.05 L9.1 ; U4.4 45.223,38.512 45.223,37.977 45.4,37.8 45.5,37.7 46.4,37.7 ; U4.6 46.223,38.51 46.223,37.877 46.4,37.7 ; U4.12 48.7,41.5 49.2,42 50.9,42 51.9,41 51.9,37.3 51.6,37 C37.2 50.3,37 50.1,37.2 50.1,37.901 49.951,38.05 L9.1 ; 46.4,37.7 47.3,37.7 48.6,39 49.3,39 49.5,38.8 L9.1
GND: BUZZ1.1 C1.1 C2.1 C3.1 C4.1 C5.1 C6.1 C7.1 C8.1 C9.1 C10.1 C11.1 C12.1 C13.1 C14.1 C16.1 C17.1 C18.1 C19.1 C20.1 C24.1 C25.1 C26.2 C27.2 C28.2 C29.2 C31.1 C32.2 C33.2 C34.1 C35.1 C36.1 C37.1 D1.2 DS1.2 J1.2 J2.2 J3.2 R8.1 R10.1 U1.1 U1.7 U2.12 U2.13 U2.16 U3.2 U4.5 U4.7 U4.8 U4.9 U4.10 U4.15 U4.17 U4.18 U4.29 U5.48 U6.0 X1.2 | length 225.4
  Top Layer w0.254: C27.2 25.9,12.15 25.6,11.85 25.6,7.65 25.818,7.432 26.318,7.432 C26.2 26.5,6.4 26.2,6.1 v1(26.2,4.8) ; C24.1 C25.1 v1(26.6,25.85) ; C20.1 C19.1 28.5,16.95 28.5,17.95 28.9,18.35 v1(28.9,19.65) 31.1,19.65 31.3,19.45 C28.2 C29.2 ; U3.2 30.1,11.05 30.6,10.55 30.6,9.25 30,8.65 30,5.35 29.8,5.15 ; C17.1@32.7,6.45 32.768,6.382 32.768,5.818 32.1,5.15 29.8,5.15 ; C34.1 34.168,6.418 34.168,5.818 33.15,4.8 v1(26.2,4.8) ; v1(35.3,17.95) v1@35.3,18.15 ; C13.1 v1@35.3,18.15 ; C18.1 37.7,42.5 v1(38.4,43.2) 39.1,42.5 C36.1 ; U2.13@38.5,5.762 U2.13 37.175,5.775 v1(36.5,6.45) 37.2,6.45 37.375,6.275 U2.12 40.037,6.275 40.277,6.035 40.277,5.523 U2.16 U2.16@40.3,5.25 ; U5.48 36.325,19.175 v1@35.3,18.15 ; C9.1@39.9,21.95 39.9,22.95 41.684,24.734 43.584,24.734 v1(43.6,24.75) 45.3,24.75 47.1,22.95 C5.1@47.1,21.95 ; U4.18 45.2,44.3 43.5,46 43.5,49.8 45.7,47.6 U4.17 ; C1.1@45.7,8.45 45.7,7.599 45.849,7.45 47.6,7.45 48.3,6.75 50.7,6.75 51,6.45 U1.1 57.8,6.05 58.2,6.45 58.2,9.55 57.9,9.85 J3.2 53.05,9.85 ; U4.5 U4.29@45.7,40.5 ; U4.7 46.7,39.1 46.5,39.3 46.5,39.7 U4.29@45.7,40.5 ; U4.15 46.704,43.459 46.704,42.904 46.5,42.7 46.5,42.3 v1(45.2,41) U4.29@45.7,40.5 ; BUZZ1.1 50.2,29.9 v1(50.8,30.5) ; U4.8 49.751,39.5 49.9,39.649 v1@49.9,40.5 ; U4.9 49.4,40 v1@49.9,40.5 ; U4.10 47.686,40.523 v1@49.923,40.523 ; C31.1 49.5,44.8 51.326,46.626 51.326,48.926 J2.2 52.4,44.3 C35.1 ; X1.2 49.3,16.413 50.787,17.9 v1(52.4,17.9) 52.4,15.05 C14.1@52.45,15 ; U1.7 50.2,9.5 50.55,9.85 53.05,9.85 ; C37.1 51,39.6 v1(50,40.6) v1@49.923,40.523 ; C2.1 52.5,9.3 53.05,9.85 ; R8.1 52,32.9 50.8,31.7 v1(50.8,30.5) ; DS1.2 54.6,30.5 53.7,31.4 51.7,31.4 v1(50.8,30.5) ; v1(26.2,4.8) 26.272,4.8 26.622,5.15 29.8,5.15 ; v1@49.9,40.5 v1@49.923,40.523
  Top Layer w0.762: 23.6,6.6 24.399,6.6 v1(26.2,4.8)
  Bottom Layer w0.254: C32.2 C33.2 28.751,17.65 28.9,17.799 v1(28.9,19.65) ; C11.1 35.2,19.45 34.5,18.75 34.5,18.099 34.649,17.95 v1(35.3,17.95) ; D1.2 37.175,7.125 v1(36.5,6.45) ; C10.1 38.15,19.45 37.877,19.177 37.877,18.899 37.728,18.75 35.494,18.75 35.345,18.601 35.345,17.995 v1(35.3,17.95) ; C16.1@39.127,6.723 C16.1 v1(36.5,6.45) ; C7.1 39.5,18.95 38.5,17.95 v1(35.3,17.95) ; C6.1 40.768,19.418 40.768,18.818 39.4,17.45 35.8,17.45 v1(35.3,17.95) ; R10.1@41.3,6.7 R10.1 41.4,6.25 40.9,5.75 ; C4.1@44.3,5.75 40.9,5.75 ; C12.1 50.675,13.625 57.225,13.625 58.1,12.75 58.1,11.37 J3.2 ; C8.1 51.463,12.15 52.913,13.6 ; v1(36.5,6.45) 36.5,5.95 36.7,5.75 40.9,5.75
  other v1: 44.1,39.9 46.3,39.9 44.1,42.1 46.3,42.1
NetB1_1: B1.1 R8.2 U5.34 | length 25.3
  Top Layer w0.254: U5.34 47.1,17.05 47.4,17.35 47.4,18.45 47.9,18.95 51.1,18.95 52,19.85 52,24.397 55.8,28.197 55.8,30.7 54.55,31.95 R8.2 54.55,35.1 B1.1
NetBUZZ1_2: BUZZ1.2 R7.1 | length 2.8
  Top Layer w0.254: R7.1 BUZZ1.2@35.35,29.85 ; BUZZ1.2@36.65,29.35 BUZZ1.2@36.7,29.3
NetC15_1: C15.1 R11.2 | length 3.4
  Top Layer w0.254: C15.1 49.25,10.6 R11.2
NetC18_2: C18.2 U4.1 | length 7.7
  Top Layer w0.254: C18.2 37.7,39 38.8,37.9 42.5,37.9 43.136,38.536 U4.1 U4.1@43.677,38.513
NetC19_2: C19.2 C20.2 L3.1 U5.24 | length 24.4
  Top Layer w0.254: C20.2@26.9,15.15 27,15.05 27,14.599 27.149,14.45 29,14.45 30.1,13.35 v1(32.7,13.35) ; C20.2 C19.2 27,16.85 27,17.45 27.1,17.55 27.1,17.827 27.123,17.85 L3.1 ; U5.24 44.787,11.413 45.787,11.413 v1(45.8,11.4)
  Bottom Layer w0.254: v1(32.7,13.35) 43.85,13.35 v1(45.8,11.4)
NetC21_1: C21.1 C22.2 C24.2 L5.2 | length 5
  Top Layer w0.254: L5.2 26.3,20.967 26.323,20.99 26.64,20.99 26.818,21.168 27.418,21.168 C21.1 C22.2 28.8,22.35 28.8,22.701 28.651,22.85 C24.2
NetC21_2: C21.2 L3.2 L4.2 L5.1 | length 3.5
  Top Layer w0.254: L5.1 26.3,20.133 26.323,20.11 26.64,20.11 26.818,19.932 27.418,19.932 27.632,19.718 27.632,19.218 27.818,19.032 27.818,18.673 27.841,18.65 L4.2 L3.2
NetC22_1: C22.1 L6.1 | length 2.2
  Top Layer w0.254: L6.1 29.95,22.8 30.2,22.55 C22.1
NetC23_1: C23.1 C26.1 L7.1 | length 4.9
  Top Layer w0.254: L7.1 26.923,10.95 26.9,10.927 26.9,10.35 26.5,9.95 26.5,8.85 26.73,8.62 27.151,8.62 27.3,8.472 27.3,7.628 27.449,7.48 27.97,7.48 C23.1@27.985,7.465
NetC23_2: C23.2 U3.5 | length 2.9
  Top Layer w0.254: C23.2@28,8.945 28,10.35 28.7,11.05 U3.5
NetC27_1: C27.1 L7.2 U6.1 | length 6.4
  Top Layer w0.254: L7.2@27.7,10.973 27.7,11.25 27.9,11.45 C27.1
  Top Layer w0.762: 23.6,13.3 27.435,13.3 27.881,12.854 27.881,12.169 C27.1
NetC28_1: C28.1 C29.1 R3.1 U3.6 | length 10.6
  Top Layer w0.254: v1(29.2,9.65) U3.6 ; C29.1@29.85,17.1 29.85,14.8 v1(30.3,14.35) ; C29.1@29.85,17.3 C29.1@29.9,17.25 ; C29.1 C28.1
  Bottom Layer w0.254: v1(29.2,9.65) 29.3,9.65 30.3,10.65 v1(30.3,14.35)
NetC31_2: C31.2 J2.1 U4.16 | length 9.2
  Top Layer w0.254: U4.16 46.2,44.4 ; C31.2 46.6,44.8 46.2,44.4 ; J2.1 46.2,46.3 46.2,44.4
NetC32_1: C32.1 C33.1 R5.1 U3.4 | length 7.9
  Top Layer w0.254: U3.4 v1(29.2,12.35)
  Bottom Layer w0.254: C33.1 C32.1 26.55,16.2 R5.1 26.55,13.95 28.15,12.35 v1(29.2,12.35)
NetC36_2: C36.2 L2.1 U4.27 | length 5.3
  Top Layer w0.254: C36.2 C36.2@39.2,40 ; C36.2@39.1,40 C36.2@39.2,40 ; C36.2@39.3,40.1 C36.2@39.2,40 ; 40.7,40 41,39.7 L2.1 ; U4.27 C36.2@39.2,40
NetDS1_1: DS1.1 R9.1 | length 1.8
  Top Layer w0.254: R9.1 DS1.1
NetJ1_1: J1.1 U4.25 U4.26 | length 21.3
  Top Layer w0.254: J1.1@41,49.8 41,42.2 42.2,41 U4.25 ; J1.1 39.993,48.993 39.993,42.507 42,40.5 U4.26
NetJ3_3: J3.3 U5.42 | length 45.1
  Top Layer w0.254: v1(33.9,14.25) 32.4,15.75 32.4,21.35 34.2,23.15 36.1,23.15 38.2,21.05 41.4,21.05 41.7,20.75 42.126,20.75 42.275,20.601 U5.42
  Bottom Layer w0.254: v1(33.9,14.25) 44.15,14.25 47.05,11.35 55.54,11.35 J3.3
NetJ3_4: J3.4 U5.1 | length 28.7
  Top Layer w0.254: v1(33.9,15.55) 33.952,15.55 35.227,16.825 35.766,16.825 35.891,16.95 35.9,16.95 37,18.05 U5.1
  Bottom Layer w0.254: v1(33.9,15.55) 34.62,14.83 46.08,14.83 46.7,15.45 47.7,15.45 48.2,14.95 56.56,14.95 J3.4
NetJ3_5: J3.5 U5.43 | length 37.9
  Top Layer w0.254: v1(35.7,22.35) 37.4,20.65 41.3,20.65 41.775,20.175 U5.43
  Bottom Layer w0.254: v1(35.7,22.35) 37.3,23.95 57.5,23.95 58.2,23.25 58.2,19.09 J3.5
NetJ3_6: J3.6 U5.36 | length 12.5
  Top Layer w0.254: U5.36 45.9,19.05 47.4,20.55 v1(48.5,20.55)
  Bottom Layer w0.254: v1(48.5,20.55) 55.721,20.55 56.261,20.01 J3.6
NetJ3_7: J3.7 U5.2 | length 27.4
  Top Layer w0.254: v1(35.805,16.045) 35.805,16.155 37.197,17.547 38.147,17.547 U5.2
  Bottom Layer w0.254: v1(35.805,16.045) 43.595,16.045 47.1,19.55 47.1,21.15 48.5,22.55 J3.7
NetL2_2: L2.2 U4.28 | length 1.7
  Top Layer w0.254: L2.2 41.7,39.2 42,39.5 U4.28
NetL4_1: L4.1 U5.23 | length 33.4
  Top Layer w0.254: L4.1 26.3,18.65 26.1,18.45 26.1,14.65 26.7,14.05 28.8,14.05 30.9,11.95 v1(32.8,11.95) ; U5.23 44.298,11.402 44.298,11.052 44.3,11.05 44.3,10.95 44.7,10.55 47.8,10.55 v1(47.9,10.45)
  Bottom Layer w0.254: v1(32.8,11.95) 33.6,12.75 43,12.75 45.3,10.45 v1(47.9,10.45)
NetL9_2: L9.2 U4.2 | length 6.7
  Top Layer w0.254: U4.2 44.2,37.7 45.1,36.8 48.1,36.8 48.65,37.35 L9.2
NetR3_2: R3.2 U5.31 | length 23.4
  Top Layer w0.254: R3.2 31.496,15.604 31.35,15.459 31.35,14.804 31.9,14.254 v1(31.9,14.25) ; U5.31 45.923,15.573 46.323,15.573 46.9,16.15 v1(48.2,16.15)
  Bottom Layer w0.254: v1(31.9,14.25) 32.004,14.354 32.304,14.354 32.7,14.75 32.7,16.15 33.1,16.55 34.1,16.55 35.4,15.25 36.4,15.25 36.6,15.45 43.9,15.45 44.6,16.15 v1(48.2,16.15)
NetR7_2: R7.2 U5.12 | length 25
  Top Layer w0.254: v1@32.6,26.771 R7.2 R7.2@32.6,28.421 ; v1(34.2,21.85) 32.919,20.569 32.919,17.626 33.376,17.169 35.623,17.169 36.981,18.527 38.56,18.527 38.752,18.335 38.752,12.765 38.56,12.573 38.173,12.573 U5.12
  Bottom Layer w0.254: v1(32.6,26.7) 32.6,23.45 v1(34.2,21.85) v1@34.2,21.998
NetR9_2: R9.2 U5.35 | length 16.9
  Top Layer w0.254: U5.35 46.6,17.55 46.9,17.85 46.9,18.65 47.7,19.45 49.3,19.45 50.9,21.05 50.9,28.6 52.118,29.818 52.768,29.818 R9.2
NetR11_1: R11.1 X1.3 | length 4.2
  Top Layer w0.254: X1.3 49.325,13.525 49.325,12.975 49.55,12.75 50.5,12.75 51.15,12.1 R11.1
NetU1_2: U1.2 U5.9 | length 29.1
  Top Layer w0.254: v1(36.8,10.95) 36.7,11.05 36.7,13.25 37.5,14.05 U5.9 ; U1.2 50.25,6 50.25,3.65 v1(50.3,3.6)
  Bottom Layer w0.254: v1(36.8,10.95) 35,9.15 35,5.15 36.55,3.6 v1(50.3,3.6)
NetU1_3: U1.3 U2.7 U5.14 | length 26.6
  Top Layer w0.254: v1(38.1,9.45) 38.245,9.45 39.233,10.437 ; U5.14 39.752,11.402 39.752,10.993 39.233,10.474 39.233,9.117 39.573,8.777 39.585,8.777 39.777,8.585 39.777,8.073 U2.7 ; v1(49.4,4.7) U1.3
  Bottom Layer w0.254: v1(38.1,9.45) 37.3,9.45 35.419,7.569 35.419,5.426 36.073,4.773 49.327,4.773 v1(49.4,4.7)
NetU1_4: U1.4 U2.4 U5.13 | length 17.4
  Top Layer w0.254: v1(38.2,10.95) 38.269,10.95 38.744,11.425 U5.13 ; U2.4 41.931,7.275 42.706,8.05 v1(43.5,8.05) 44.5,7.05 47.2,7.05 48.185,6.065 48.585,6.065 U1.4
  Bottom Layer w0.254: v1(38.2,10.95) 42.1,10.95 42.6,10.45 42.6,8.75 42.836,8.514 42.889,8.514 43.352,8.05 v1(43.5,8.05)
NetU1_5: U1.5 U2.6 U5.15 | length 13
  Top Layer w0.254: U5.15 40.252,11.402 40.252,11.007 39.7,10.454 39.7,9.245 40.277,8.668 U2.6@40.277,8.323 ; U2.6 40.3,8.3 40.323,8.323 42.273,8.323 42.8,8.85 44.983,8.85 45.183,9.05 48.451,9.05 48.6,8.901 U1.5
NetU2_8: U2.8 U5.8 | length 10.5
  Top Layer w0.254: U5.8 36.8,14.55 35.8,13.55 35.8,10.413 37.961,8.252 39.277,8.252 39.302,8.227 U2.8@39.302,8.055
NetU2_9: U2.9 U5.6 | length 11.3
  Top Layer w0.254: U5.6 37.055,15.55 35.4,13.895 35.4,10.15 37.752,7.798 38.489,7.798 U2.9
NetU2_11: U2.11 U5.4 | length 13.3
  Top Layer w0.254: U5.4 37.494,16.55 35,14.056 35,9.713 37.915,6.798 38.489,6.798 U2.11
NetU4_20: U4.20 U5.33 | length 57.9
  Top Layer w0.254: v1(42.6,44.9) 43.8,44.9 44.2,44.5 U4.20 ; U5.33 47.4,16.55 v1(48.6,17.75)
  Bottom Layer w0.254: v1(42.6,44.9) 42.6,28.05 46.2,24.45 57.7,24.45 58.7,23.45 58.7,17.85 57.075,16.225 50.125,16.225 v1(48.6,17.75)
NRST: C16.2 D1.1 U5.18 | length 8.8
  Top Layer w0.254: v1(40.6,9.95) 40.687,9.95 41.752,11.015 41.752,11.402 U5.18
  Bottom Layer w0.254: D1.1 38.1,8.25 39.8,9.95 40.496,9.95 v1(40.6,9.95) 40.6,8.15 40.3,7.85 C16.2
OSC32_IN: C5.2 U5.39 X2.1 | length 4.5
  Top Layer w0.254: U5.39 43.775,20.925 44.143,21.293 44.143,21.843 X2.1@44.25,21.95 ; X2.1 44.35,22.25 C5.2
OSC32_OUT: C9.2 U5.40 X2.2 | length 4.5
  Top Layer w0.254: C9.2 42.65,22.25 X2.2 ; X2.2@42.666,21.95 42.757,21.859 42.757,21.293 43.275,20.775 U5.40
OSC_IN: C15.2 U5.26 | length 4.9
  Top Layer w0.254: U5.26 45.923,13.027 46.323,13.027 46.6,12.75 46.6,11.65 46.9,11.35 47.9,11.35 48.5,11.95 C15.2
PB0-VDD_TCX0: C14.2 U5.30 X1.1 X1.4 | length 9.4
  Top Layer w0.254: U5.30 46.3,15.05 46.7,15.45 47.7,15.45 48.802,14.348 50.152,14.348 50.326,14.174 50.326,13.724 50.5,13.55 X1.4 ; X1.1 X1.4 ; C14.2@52.05,13.5 C14.2@52.1,13.55 ; C14.2 C14.2@52.1,13.55 ; X1.4 C14.2@52.1,13.55
RFI_N: C34.2 L8.1 U5.21 | length 19.4
  Top Layer w0.254: U5.21 43.298,11.402 43.298,10.952 43.8,10.45 44.1,10.45 44.7,9.85 v1(44.7,9.75)
  Top Layer w0.381: v1(33.6,10.55) 33.6,10.437 33.15,9.987 L8.1 33.877,8.95 34.1,8.727 C34.2@34.1,7.85
  Bottom Layer w0.254: v1(33.6,10.55) 35.3,12.25 42.9,12.25 44.619,10.531 44.619,9.831 v1(44.7,9.75)
RFI_P: C30.2 L8.2 U5.20 | length 20.2
  Top Layer w0.254: U5.20 42.775,10.375 v1(43.4,9.75)
  Top Layer w0.381: C30.2@31.2,7.734 31.2,8.627 31.523,8.95 L8.2 32.45,9.987 32,10.437 v1(32,10.55)
  Bottom Layer w0.254: v1(32,10.55) 33.064,9.486 33.736,9.486 36,11.75 42.5,11.75 43.4,10.85 v1(43.4,9.75)
RX_MATCHING_NW: C17.2 C30.1 U3.3 | length 10.1
  Top Layer w0.254: U3.3 30.3,11.45 31,10.75 31,9.15 30.4,8.55 30.4,6.599 30.549,6.45 C30.1 31.8,6.45 32,6.65 32,7.701 32.149,7.85 C17.2@32.7,7.85 ; C17.2@32.477,7.577 32.7,7.8 C17.2@32.7,7.85 ; C17.2 C17.2@32.7,7.85
TX_MATCHING_NW: C25.2 L6.2 U3.1 | length 32.2
  Top Layer w0.254: v1(28.5,25.9) 28.5,25.795 28,25.295 C25.2 29,24.35 29.2,24.35 29.4,24.15 L6.2 ; v1(29.1,6.05) 29.626,6.576 29.626,8.776 30.2,9.35 30.2,10.45 30,10.65 U3.1
  Bottom Layer w0.254: v1(28.5,25.9) 32.3,22.1 32.3,17.85 31.1,16.65 31.1,8.05 v1(29.1,6.05)
VDDRF1V55: C13.2 L1.1 U5.29 U5.45 | length 12.8
  Top Layer w0.254: v1(33.7,17.95) 33.719,17.969 33.719,18.572 33.9,18.753 C13.2 33.9,20.601 34.049,20.75 34.8,20.75 34.823,20.727 L1.1@34.846,20.75 ; L1.1@34.823,20.773 L1.1@34.846,20.75 ; U5.45 40.775,19.775 40.3,20.25 37.2,20.25 36.1,21.35 35.1,21.35 34.9,21.15 34.9,20.773 34.877,20.75 L1.1 L1.1@34.846,20.75 ; U5.29 v1(47.3,14.55)
VLXSMPS: L1.2 U5.47 | length 5.2
  Top Layer w0.254: L1.2 36.1,20.75 37,19.85 39.603,19.85 39.752,19.701 39.752,19.198 U5.47
pads on no net: U2.2 U2.3 U2.5 U2.10 U2.15 U4.11 U4.13 U4.19 U4.21 U4.22 U4.23 U4.24 U5.3 U5.5 U5.7 U5.10 U5.16 U5.17 U5.22 U5.27 U5.32 U5.38

## Polygon pours and split planes (outlines as drawn)
GND on GND Plane (split plane): 59.49,0.51 0.51,0.51 0.51,54.49 59.49,54.49
2V5 on Power Plane (split plane): 59.49,0.51 0.51,0.51 0.51,54.49 59.49,54.49
VDDRF1V55 on Power Plane (split plane): 48.471,14.996 48.471,14.004 47.846,13.379 46.754,13.379 43.392,16.742 43.35,16.77 43.3,16.779 33.254,16.779 32.529,17.504 32.529,18.396 33.254,19.121 44.346,19.121

## Other copper
Top Layer:
  rectangle net 2V5: 49.34,7.21 49.57,7.51
  rectangle net 2V5: 51.37,7.25 51.6,7.55
  rectangle net GND: 52.55,9.525 52.78,9.825
Bottom Layer:
  region net GND: 52.4,13.15 52.4,13.55 52.95,13.55
Power Plane (plane layer: these items are gaps in the copper):
  lines w0.254: 32.4,17.45 33.2,16.65 43.3,16.65 46.7,13.25 47.9,13.25 48.6,13.95 48.6,15.05 44.4,19.25 33.2,19.25 32.4,18.45 32.4,17.45

## Silkscreen, mask and mechanical layers (free items; w line width, h text height)
Top Overlay:
  drawing of 72 lines, arcs and shapes, not listed
  text "DEOP2023_Hergueta_Garces" at 6.054,51.777 h1.27
  text "HEFESTO" at 28.5,31.8 h2.2 r90

## Text inside footprints (layer, text, board x,y; h text height)
U6: Top Overlay "868 MHz antenna" at 20.458,24.298 h1.52 r90